# Altium PCB PCB1.PcbDoc
Units mil, origin at the board's own origin, x right, y up, seen from the top; angles counter-clockwise.
Board outline 5721.11 x 4025 mil, 2 copper layers (Top Layer, Bottom Layer), stack 61.756 mil thick; 41 components, 18 nets, 112 pads, 2 vias.
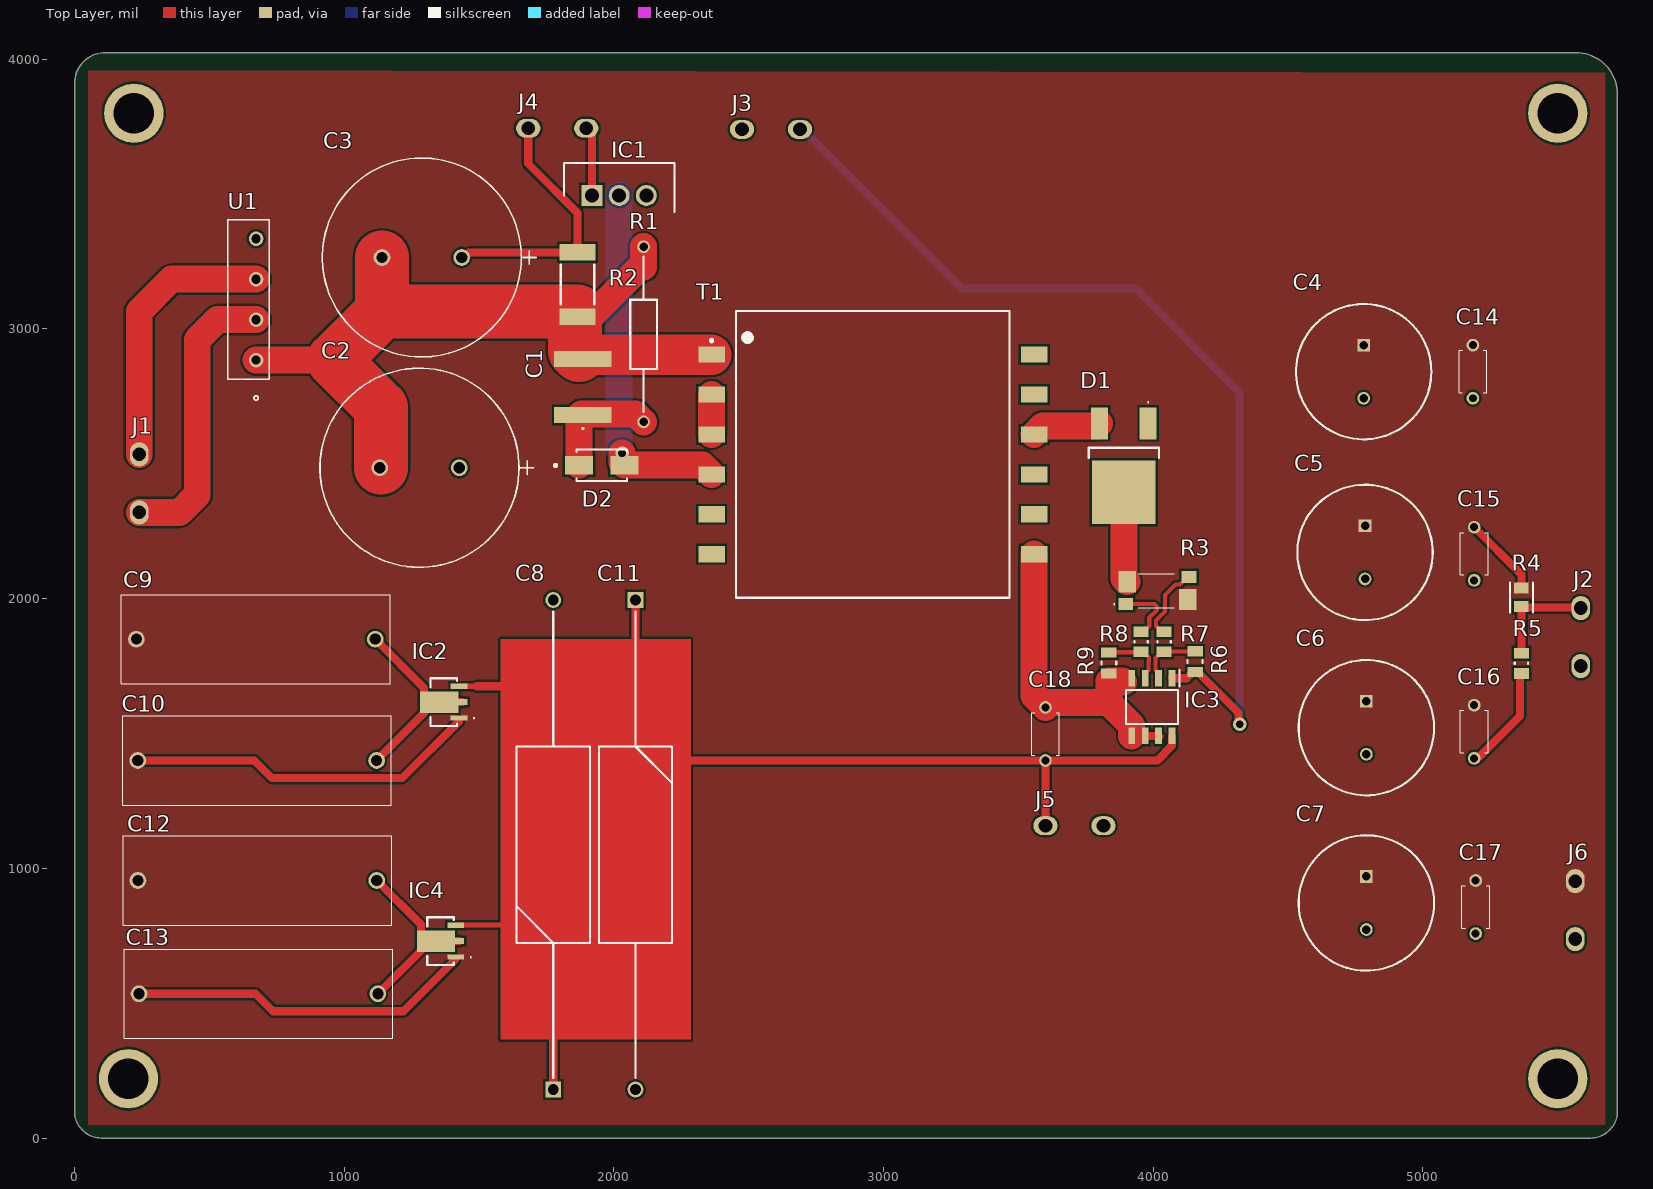
[diagram p0: Top Layer view]
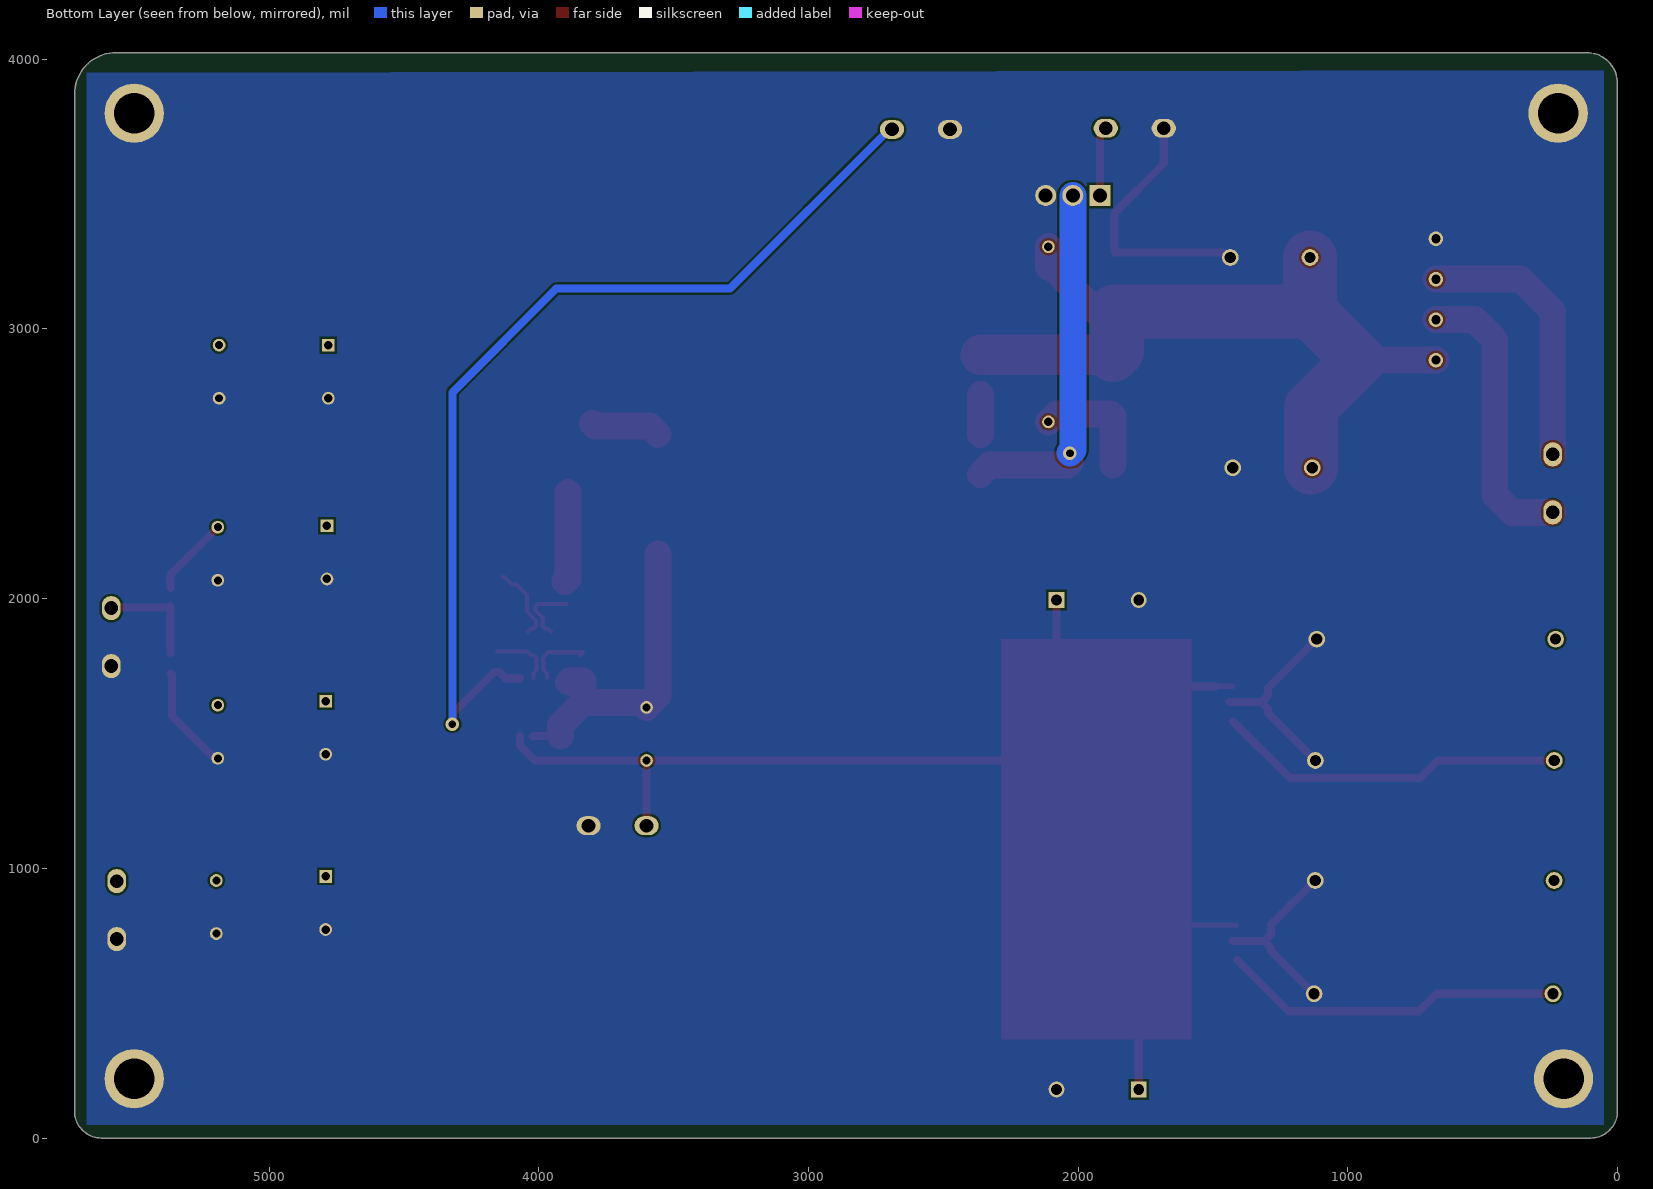
[diagram p1: Bottom Layer view, seen from below]
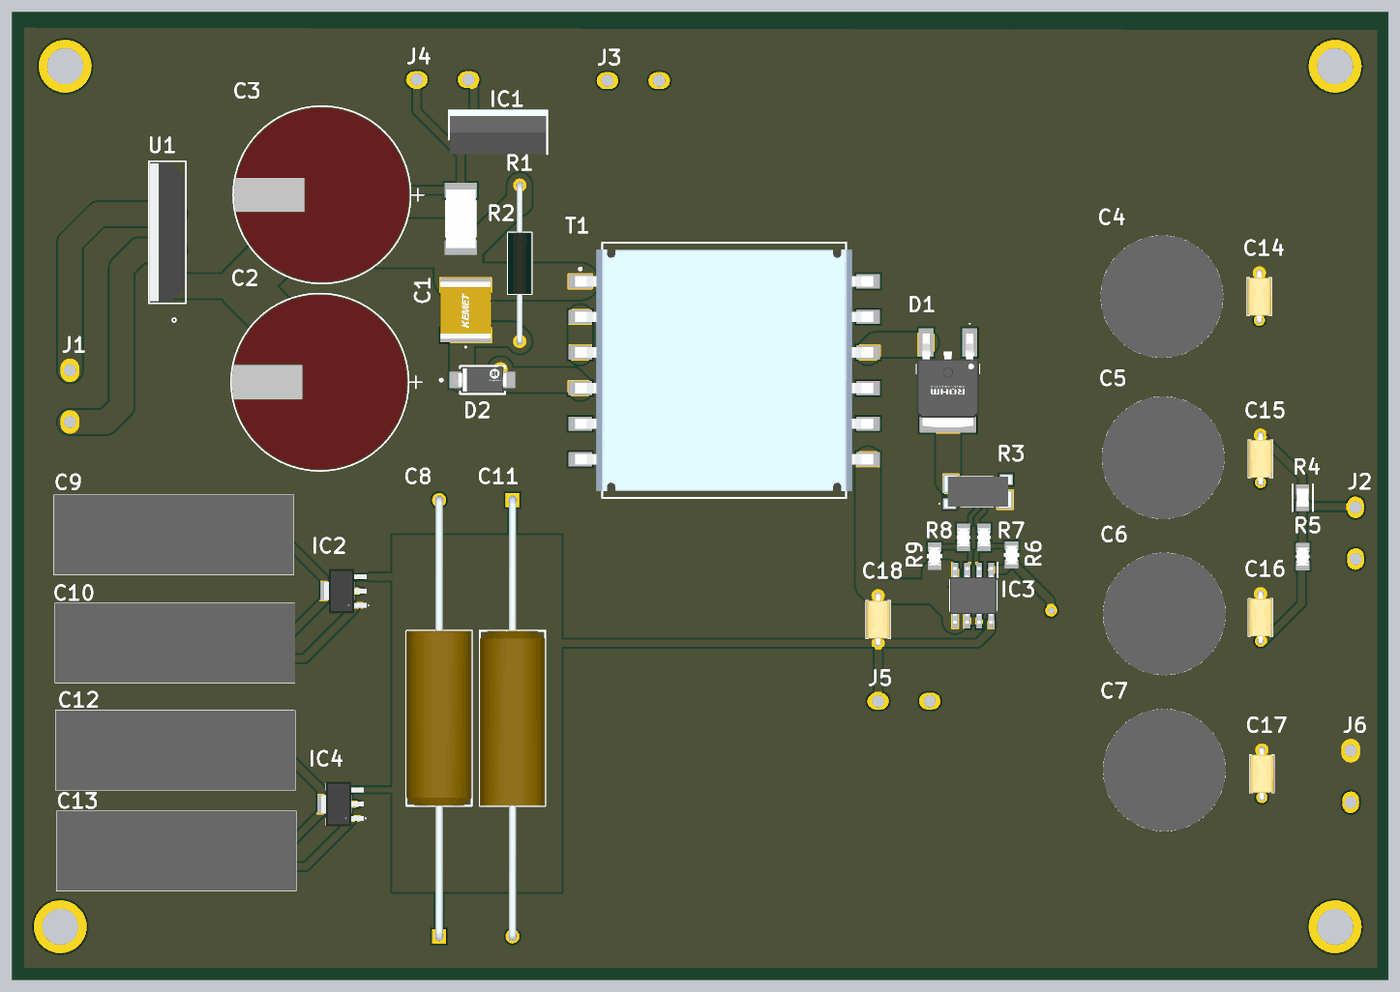
[diagram p2: 3D render of the assembled board from above, using the file's embedded part models]

## Layer stack, top to bottom
Top Solder: solder mask 1, SM-001, Dk 4
Top Layer: signal copper 1.378
Dielectric 1: core 59, Core-043, Dk 4.3
Bottom Layer: signal copper 1.378
Bottom Solder: solder mask 1, SM-001, Dk 4

## Board outline
5215,4025 5566.11,4025 cw(c5566.11,3870.01) 5721.11,3870 5721.11,100 cw(c5621.12,99.99) 5621.11,0 100,0 cw(c100,100) 0,100 0,3910 cw(c115,3910) 115,4025

## Design rules (kind name [scope] priority, off if disabled: settings)
BoardOutlineClearance [All] p1: gap=7.87 ignorepadtopadclearanceinfootprint=FALSE except(15.75: Arc-SplitBarrior Arc-SplitContinuation Track-SplitBarrior Track-SplitContinuation SMDPad-SplitBarrior SMDPad-SplitContinuation THPad-SplitBarrior THPad-SplitContinuation Via-SplitBarrior Via-SplitContinuation Fill-SplitBarrior Fill-SplitContinuation Poly-SplitBarrior Poly-SplitContinuation Region-SplitBarrior Region-SplitContinuation Text-SplitBarrior Text-SplitContinuation)
Clearance "Clearance Bottom Layer" [OnLayer('Bottom Layer')] p1: gap=8 ignorepadtopadclearanceinfootprint=TRUE except(10: Arc-Text Track-Text SMDPad-Text THPad-Text Via-Text Fill-Text Poly-Text Region-Text Text-Text)
Clearance "Clearance Top Layer" [OnLayer('Top Layer')] p2: gap=8 ignorepadtopadclearanceinfootprint=TRUE except(10: Arc-Text Track-Text SMDPad-Text THPad-Text Via-Text Fill-Text Poly-Text Region-Text Text-Text)
Clearance [All] p3: gap=7.87 ignorepadtopadclearanceinfootprint=FALSE except(3.5: Arc-Arc Arc-Track Arc-SMDPad Track-Track Track-SMDPad SMDPad-SMDPad; 5: Arc-Via Track-Via SMDPad-Via THPad-Via Via-Via; 10: Arc-Text Track-Text SMDPad-Text THPad-Text Via-Text Fill-Text Poly-Text Region-Text Text-Text)
DiffPairsRouting [All] p1: maxlimit=10 minlimit=10 mostfreqgap=10 toplayer_minwidth=15 toplayer_maxwidth=15 toplayer_prefwidth=15 bottomlayer_minwidth=15 bottomlayer_maxwidth=15 bottomlayer_prefwidth=15 maxuncoupledlength=500
HoleSize [All] p1: absolutevalues=TRUE maxlimit=248.03 minlimit=7.87 maxpercent=80.000 minpercent=20.000
MinimumAnnularRing [All] p1: minimumring=3
MinimumSolderMaskSliver [All] p1: minsoldermaskwidth=3.94
PolygonConnect PolygonConnect_1 [All] p1: connectstyle=Direct reliefconductorwidth=20 reliefentries=4 polygonreliefangle="90 Angle" airgapwidth=10
RoutingCorners [All] p1: cornerstyle=Round minsetback=100 maxsetback=100
RoutingVias [All] p1: holewidth=19.68 width=39.37 viastyle="Through Hole" minholewidth=7.87 minwidth=17.72 maxholewidth=39.37 maxwidth=78.74
SilkToSilkClearance [All] p1: silktosilkclearance=3.94
SilkToSolderMaskClearance [IsPad] p1: minsilkscreentomaskgap=3.94 clearancetoexposedcopper=TRUE
SolderMaskExpansion [All] p1: expansion=4 istentingtop=FALSE
Width [All] p1: maxlimit=300 minlimit=3.5 preferedwidth=15 minimp=50.000000 maximp=50.000000 favimp=50.000000
24 further rules are at their usual default settings.

## Classes and differential pairs
differential pair SENSE: +SENSE_P -SENSE_N
differential pair SENSE_OP: +SENSE_OP_P -SENSE_OP_N

## Components (designator, comment, footprint, x,y, rotation, side; value= is the part's Value field where it differs from the comment)
C1 "C2220C105K2RACTU" C2220 1885,2785 r90 top
C2 "500HXW100MEFR18X45" CAP_HXW_18X45_RUB#1 1426.7,2485.45 r180 top
C3 "500HXW100MEFR18X45" CAP_HXW_18X45_RUB#2 1435.28,3265 r180 top
C4 "EGXF630ELL511MK25S" CAPPRD500W60D1275H2650 4780,2940 r270 top
C5 "EGXF630ELL511MK25S" CAPPRD500W60D1275H2650 4785,2270 r270 top
C6 "EGXF630ELL511MK25S" CAPPRD500W60D1275H2650 4790,1620 r270 top
C7 "EGXF630ELL511MK25S" CAPPRD500W60D1275H2650 4790,970 r270 top
C8 "MAL202139229E3" CAPPA4610W80L1850D690 1775,180 r90 top
C9 "ECW-FD2J105J" ECWFD2J105J 1115,1850 r180 top
C10 "ECW-FD2J105J" ECWFD2J105J 1120,1400 r180 top
C11 "MAL202139229E3" CAPPA4610W80L1850D690 2080,1995 r270 top
C12 "ECW-FD2J105J" ECWFD2J105J 1120.83,955 r180 top
C13 "ECW-FD2J105J" ECWFD2J105J 1125,535 r180 top
C14 "K104K15X7RF5TH5" K104K15X7RF5TH5 5185,2743.15 r90 top
C15 "K104K15X7RF5TH5" K104K15X7RF5TH5 5190,2068.15 r90 top
C16 "K104K15X7RF5TH5" K104K15X7RF5TH5 5190,1408.15 r90 top
C17 "K104K15X7RF5TH5" K104K15X7RF5TH5 5195.55,758.06 r90 top
C18 "K104K15X7RF5TH5" K104K15X7RF5TH5 3600,1596.85 r270 top
D1 "RFN5BGE3STL" RD3P175SNFRATL 3890.55,2482.68 r180 top
D2 "S1M" FP-403AE-MFG 1955,2495 r0 top
IC1 "STP8N80K5" TO255P460X1020X2008-3P 1919.21,3495 r0 top
IC2 "NCP785AH50T1G" NCP785AH50T1G 1369.06,1616.2 r90 top
IC3 "TL032ID" SOIC127P600X175-8N 3995,1598.23 r270 top
IC4 "NCP785AH50T1G" NCP785AH50T1G 1356.93,730 r90 top
J1 "Component_1" PCBComponent_1 240,2320 r90 top
J2 "Component_1" PCBComponent_1 5585,1965 r270 top
J3 "Component_1" PCBComponent_1 2690,3740 r180 top
J4 "Component_1" PCBComponent_1 1897.39,3744.14 r180 top
J5 "Component_1" PCBComponent_1 3600,1158.41 r0 top
J6 "Component_1" PCBComponent_1 5564.75,952.68 r270 top
R1 "MRS25000C7500FRP00" RESAD1650W60L650D250 2110,3305 r270 top
R2 "CRCW251210K0JNEG" FP-CRCW2512-e3-IPC_A 1865,3165 r270 top
R3 "Y14870R10000B9R" Y14870R10000B9R 4015,2030 r0 top
R4 "CR0805-FX-1003ELF" FP-CR0805-IPC_B 5365,2005 r90 top
R5 "CRCW080520K0FKTA" FP-CRCW0805-e3-IPC_B 5365,1760 r90 top
R6 "CRCW0805330KFKEA" FP-CRCW0805-e3-MFG 4155,1766.61 r270 top
R7 "CRCW080520K0FKEB" FP-CRCW0805-e3-IPC_B 4040,1840 r270 top
R8 "CRCW080520K0FKEB" FP-CRCW0805-e3-IPC_B 3955,1840 r270 top
R9 "CRCW0805330KFKEA" FP-CRCW0805-e3-MFG 3835,1761.61 r90 top
T1 "750311771" EFD25 2960,2535 r0 top
U1 "KBP210G" TO_P2005G_DIO 673.23,2884.45 r90 top

## Footprints (in the part's own frame and the unit in brackets; to place one, negate y for a bottom-side part, rotate by r counter-clockwise, add the part's x,y. Pads: shape width x height; smd on the part's side, far side on the other; paste and mask are expansions set on the pad)
C2220 [mm]
  rect 1.5x5.4 smd: 1(-2.65,0) 2(2.65,0)
  silkscreen extent -3.95,-0.05 -3.85,0.05, body extent -3.05,-2.7 3.05,2.7, height 1.15
CAP_HXW_18X45_RUB#1 [mil]
  round 62 / inner round 60 / far side round 62 hole 42 paste-31 mask+0: 1(0,0) 2(295.28,0)
  silkscreen extent -276,-369 516,369, body extent -216,-363 512,363, height 1851
CAP_HXW_18X45_RUB#2 [mil]
  round 62 hole 42 paste-31 mask+0: 1(0,0)
  round 62 / inner round 60 / far side round 62 hole 42 paste-31 mask+0: 2(295.28,0)
  silkscreen extent -276,-369 516,369, body extent -216,-363 512,363, height 1851
CAPPA4610W80L1850D690 [mm]
  rect 1.5x1.5 hole 1: 1(0,0)
  round 1.5 hole 1: 2(46.1,0)
  silkscreen extent 1.1,-3.45 45,3.45, body extent -0.4,-3.45 46.5,3.45, height 6.89
CAPPRD500W60D1275H2650 [mm]
  rect 1.2x1.2 hole 0.8: 1(0,0)
  round 1.2 hole 0.8: 2(5,0)
  silkscreen extent -3.87,-6.37 8.87,6.38, body extent -4,-6.49 9,6.49, height 26.5
ECWFD2J105J [mm]
  round 1.575 hole 1.05: 1(0,0) 2(22.5,0)
  silkscreen extent -1.4,-4.2 23.9,4.2, body extent -1.4,-4.2 23.9,4.2, height 15.1
EFD25 [mm] "SMD, 12-Leads, Body 27.0x28.0mm (max), Pitch 3.76mm, IPC Medium Density"
  rect 2.5x1.52 smd: 1(-15.19,9.4) 2(-15.19,5.64) 3(-15.19,1.88) 4(-15.19,-1.88) 5(-15.19,-5.64) 6(-15.19,-9.4) 7(15.19,-9.4) 8(15.19,-5.64) 9(15.19,-1.88) 10(15.19,1.88) 11(15.19,5.64) 12(15.19,9.4)
  silkscreen extent -15.31,-13.5 12.87,13.5, body extent -15.75,-12.75 15.75,12.75, height 13.25
FP-403AE-MFG [mm]
  rect 2.65x1.75 smd paste+0 mask+0: 1(-2.15,0) 2(2.15,0)
  silkscreen extent -4.47,-1.48 2.37,1.48, body extent -3.57,-1.58 3.57,1.58, height 0.25
FP-CR0805-IPC_B [mil]
  rect 41.66x53.63 smd paste+0 mask+0: 1(-34.53,0) 2(34.53,0)
  silkscreen extent -55,-43 55,43, body extent -65,-37 65,37, height 10
FP-CRCW0805-e3-IPC_B [mil]
  rect 39.63x55.44 smd paste+0 mask+0: 1(-37.44,0) 2(37.44,0)
  silkscreen extent -3,-25 3,25, body extent -67,-38 67,38, height 10
FP-CRCW0805-e3-MFG [mm]
  rect 0.95x1.45 smd paste+0 mask+0: 1(-0.975,0) 2(0.975,0)
  silkscreen extent -0.13,-0.7 0.13,0.7, body extent -1.55,-0.82 1.55,0.82, height 0.25
FP-CRCW2512-e3-IPC_A [mil]
  rect 61.22x134.18 smd paste+0 mask+0: 1(-119.12,0) 2(119.12,0)
  silkscreen extent -74,-62 74,62, body extent -169,-87 169,87, height 10
K104K15X7RF5TH5 [mm]
  round 1.2 hole 0.75: 1(0,0) 2(5,0)
  silkscreen extent 0.5,-1.3 4.5,1.3, body extent -0.25,-1.3 5.25,1.3, height 7.31
NCP785AH50T1G [mm]
  rect 0.5x1.57 smd: 1(-1.5,-1.44) 3(1.5,-1.44)
  rect 0.58x0.86 smd: 2(0,-1.795)
  rect 2x3.59 smd: 4(0,0.43)
  silkscreen extent -2.25,-2.9 2.25,1.25, body extent -2.35,-2.64 2.35,1.85, height 1.76
PCBComponent_1 [mil]
  oval 90x70 hole 50.8: 0(0,0) 1(215,0)
RD3P175SNFRATL [mm]
  rect 1.6x3 smd: 1(-2.3,-4.25) 3(2.3,-4.25)
  rect 6x6 smd: 2(0,2.25)
  silkscreen extent -3.3,-6.3 3.3,-1, body extent -3.3,-5.2 3.3,4.7, height 2.5
RESAD1650W60L650D250 [mm]
  round 1.2 hole 0.8: 1(0,0) 2(16.5,0)
  silkscreen extent 0.95,-1.25 15.55,1.25, body extent -0.3,-1.24 16.8,1.24, height 2.5
SOIC127P600X175-8N [mm]
  rect 1.525x0.65 smd: 1(-2.712,1.905) 2(-2.712,0.635) 3(-2.712,-0.635) 4(-2.712,-1.905) 5(2.712,-1.905) 6(2.712,-0.635) 7(2.712,0.635) 8(2.712,1.905)
  silkscreen extent -3.47,-2.45 1.6,2.58, body extent -3,-2.45 3,2.45, height 1.75
TO255P460X1020X2008-3P [mm]
  rect 1.98x1.98 hole 1.32: 1(0,0)
  round 1.98 hole 1.32: 2(2.55,0) 3(5.1,0)
  silkscreen extent -2.65,-1.53 7.75,3.07, body extent -2.55,-1.53 7.65,3.07, height 19.22
TO_P2005G_DIO [mil]
  round 54 / inner round 60 / far side round 54 hole 34 paste-27 mask+0: 1(0,0) 2(150,0) 3(300,0) 4(450,0)
  silkscreen extent -148,-49 520,105, body extent -66,-44 516,100, height 808
Y14870R10000B9R [mm]
  rect 1.39x1.14 smd: E1(-2.985,-1.27) E2(2.985,1.27)
  rect 1.65x2.01 smd: I1(-2.855,0.835) I2(2.855,-0.835)
  silkscreen extent -4.1,-1.6 1.6,1.6, body extent -3.57,-1.73 3.57,1.73, height 0.73

## Part data
C1: "Capacitor", Manufacturer_Name=KEMET, Supplier Part Number 1=80-C2220C105K2RACTU, Datasheet Link=https://content.kemet.com/datasheets/KEM_C1002_X7R_SMD.pdf, Height=2.2mm, Manufacturer_Part_Number=C2220C105K2RACTU, Supplier 1=Mouser
C2 C3: "No Description Available", Mfr_Name=Rubycon, Supplier Part Number 1=232-0HXW100MEFR18X45, Digi-Key_Part_Number_1=1189-4253-ND, Supplier 1=Mouser
C4 C5 C6 C7: "Capacitor Polarised", Manufacturer_Name=Chemi-Con, Mouser Part Number=661-EGXF630ELL511MK2, Datasheet Link=https://www.mouser.com/datasheet/2/420/United-Chemi-Con-1016798.pdf, Height=26.5mm, Manufacturer_Part_Number=EGXF630ELL511MK25S, Mouser Price/Stock=https://www.mouser.co.uk/ProductDetail/United-Chemi-Con/EGXF630ELL511MK25S?qs=8BXZADTIn4FuMrtucNpwhg%3D%3D
  C4: Supplier 1=Mouser, Supplier Part Number 1=661-EGXF630ELL511MK2
C8 C11: "Capacitor Polarised", Manufacturer_Name=Vishay, Mouser Part Number=594-2222-021-39229, Arrow Part Number=MAL202139229E3, Arrow Price/Stock=https://www.arrow.com/en/products/mal202139229e3/vishay?region=nac, Datasheet Link=https://componentsearchengine.com/Datasheets/2/MAL202139229E3.pdf, Manufacturer_Part_Number=MAL202139229E3, Mouser Price/Stock=https://www.mouser.co.uk/ProductDetail/Vishay-BC-Components/MAL202139229E3?qs=KQJA%252BRRrFWe8KeR1ZcOE%2FA%3D%3D
  C8: Supplier 1=Mouser, Supplier Part Number 1=594-2222-021-39229
C9 C10 C12 C13: "Capacitor", Manufacturer_Name=Panasonic, Mouser Part Number=667-ECW-FD2J105J, Arrow Part Number=ECW-FD2J105J, Arrow Price/Stock=https://www.arrow.com/en/products/ecw-fd2j105j/panasonic, Datasheet Link=https://industrial.panasonic.com/cdbs/www-data/pdf/RDI0000/ABD0000C255.pdf, Height=15mm, Manufacturer_Part_Number=ECW-FD2J105J, Mouser Price/Stock=https://www.mouser.com/Search/Refine.aspx?Keyword=667-ECW-FD2J105J
  C9: Supplier 1=Mouser, Supplier Part Number 1=667-ECW-FD2J105J
C14 C15 C16 C17 C18: "Capacitor", Manufacturer_Name=Vishay, Mouser Part Number=594-K104K15X7RF5TH5, Arrow Part Number=K104K15X7RF5TH5, Arrow Price/Stock=https://www.arrow.com/en/products/k104k15x7rf5th5/vishay?region=europe, Datasheet Link=https://www.vishay.com/docs/45171/kseries.pdf, Height=6.6mm, Manufacturer_Part_Number=K104K15X7RF5TH5, Mouser Price/Stock=https://www.mouser.co.uk/ProductDetail/Vishay-BC-Components/K104K15X7RF5TH5?qs=CuWZN%2F5Vbiofhf%252BuZNGw%2Fg%3D%3D
  C14: Supplier 1=Mouser, Supplier Part Number 1=594-K104K15X7RF5TH5
D1: "Diode", Manufacturer_Name="ROHM Semiconductor", Mouser Part Number=755-RFN5BGE3STL, Datasheet Link=https://fscdn.rohm.com/en/products/databook/datasheet/discrete/diode/fast_recovery/rfn5bge3s-e.pdf, Manufacturer_Part_Number=RFN5BGE3STL, Mouser Price/Stock=https://www.mouser.co.uk/ProductDetail/ROHM-Semiconductor/RFN5BGE3STL?qs=gTYE2QTfZfS830v3%252BAHYoA%3D%3D, Supplier 1=Mouser, Supplier Part Number 1=755-RFN5BGE3STL
D2: library part CMP-2000-04942-3, "DIODE GEN PURP 1KV 1A SMA", Average Rectified Current=1A, Capacitance=12pF, Case/Package=SMA, Forward Voltage=1.1V, Max Forward Surge Current (Ifsm)=30A, Max Operating Temperature=150°C, Max Repetitive Reverse Voltage (Vrrm)=1kV, Max Surge Current=40A, Min Operating Temperature=-55°C, Package Quantity=1, Peak Reverse Current=1uA, Power Dissipation=1.4W, Contact Plating=Tin, Current=1A, Current Rating=1A, Element Configuration=Single, Forward Current=1A, Height=2.2mm, Lead Free="Lead Free", Length=4.75mm, Max Reverse Voltage (DC)=1kV, Mount="Surface Mount", Number of Pins=2, Output Current=1A, Packaging="Tape and Reel", Peak Non-Repetitive Surge Current=30A, Polarity=Standard, Radiation Hardening=No, REACH SVHC="No SVHC", Recovery Time=1800ns, Reverse Recovery Time=1.8us, Reverse Voltage=1kV, Termination=SMD/SMT, Voltage=1kV, Voltage Rating (DC)=1kV, Width=5.28mm
IC1: "Integrated Circuit", Manufacturer_Name=STMicroelectronics, Mouser Part Number=511-STP8N80K5, Supplier Part Number 1=511-STU8N80K5, Datasheet Link=https://www.st.com/resource/en/datasheet/stp8n80k5.pdf, Height=4.6mm, Manufacturer_Part_Number=STP8N80K5, Mouser Price/Stock=https://www.mouser.co.uk/ProductDetail/STMicroelectronics/STP8N80K5?qs=RzIIFhRKomv5IC85NofN1A%3D%3D, Supplier 1=Mouser
IC2 IC4: "Integrated Circuit", Manufacturer_Name=onsemi, Mouser Part Number=863-NCP785AH50T1G, Arrow Part Number=NCP785AH50T1G, Arrow Price/Stock=https://www.arrow.com/en/products/ncp785ah50t1g/on-semiconductor?region=nac, Datasheet Link=http://www.mouser.com/ds/2/308/NCP785A-D-532012.pdf, Height=1.6mm, Manufacturer_Part_Number=NCP785AH50T1G, Mouser Price/Stock=https://www.mouser.co.uk/ProductDetail/onsemi/NCP785AH50T1G?qs=k6dkFvHqcvALNdsDcRACbw%3D%3D, Supplier 1=Mouser, Supplier Part Number 1=863-NCP785AH50T1G
IC3: "Integrated Circuit", Manufacturer_Name="Texas Instruments", Mouser Part Number=595-TL032ID, Arrow Part Number=TL032ID, Arrow Price/Stock=https://www.arrow.com/en/products/tl032id/texas-instruments, Datasheet Link=http://www.ti.com/lit/ds/symlink/tl032.pdf, Height=1.75mm, Manufacturer_Part_Number=TL032ID, Mouser Price/Stock=https://www.mouser.co.uk/ProductDetail/Texas-Instruments/TL032ID?qs=RZS%252BpEsUn7pGfb6fvXIvLw%3D%3D, Supplier 1=Mouser, Supplier Part Number 1=595-TL032ID
R1: "Resistor", Manufacturer_Name=Vishay, Supplier Part Number 1=594-MRS25000C7500FRP, Datasheet Link=http://www.vishay.com/docs/28724/mrs16m25.pdf, Manufacturer_Part_Number=MRS25000C7500FRP00, Supplier 1=Mouser
R2: library part CMP-02407-002758-1, "RES Thick Film, 10kΩ, 5%, 1W, 200ppm/°C, 2512", Case Code (Imperial)=2512, Case Code (Metric)=6432, Max Operating Temperature=155°C, Max Power Dissipation=1W, Min Operating Temperature=-55°C, Package Quantity=1, Resistance=10kR, Temperature Coefficient=200ppm/°C, Tolerance=5%, Voltage Rating=500V, Case/Package=2512, Composition="Thick Film", Contact Plating=Tin, Depth=3.15mm, Features="Automotive AEC-Q200", Height=0.028inch, Lead Free="Lead Free", Length=6.3mm, Military Standard=Not, Mount="Surface Mount", Number of Pins=2, Number of Terminations=2, Packaging="Tape and Reel", Power Rating=1W, Radiation Hardening=No, REACH SVHC="No SVHC", Termination=SMD/SMT, Voltage Rating (DC)=500V, Weight=0.001429oz, Width=0.124inch
R3: "Resistor", Manufacturer_Name=Vishay, Mouser Part Number=71-CSM25120R1000BST, Arrow Part Number=Y14870R10000B9R, Arrow Price/Stock=https://www.arrow.com/en/products/y14870r10000b9r/vishay-precision-group?region=nac, Datasheet Link=http://uk.rs-online.com/web/p/products/6841649, Height=0.635mm, Manufacturer_Part_Number=Y14870R10000B9R, Mouser Price/Stock=https://www.mouser.co.uk/ProductDetail/Vishay-Precision-Group-Foil-Resistors/Y14870R10000B9R?qs=eqe8eff%252BweTiXYXyeP50BA%3D%3D, Supplier 1=Mouser, Supplier Part Number 1=71-CSM25120R1000BST
R4: library part CMP-1013-00736-2, "Thick Film Chip Resistors 0805 100kΩ 0.125W 1% 100ppm/°C", Case Code (Imperial)=0805, Case Code (Metric)=2012, Max Operating Temperature=155°C, Max Power Dissipation=125mW, Min Operating Temperature=-55°C, Package Quantity=5000, Resistance=100kR, Temperature Coefficient=100ppm/°C, Tolerance=1%, Voltage Rating=150V, Voltage Rating (DC)=100V, Case/Package=0805, Composition="Thick Film", Contact Plating=Tin, Depth=1.25mm, Features="Moisture Resistant", Height=0.5mm, Length=2mm, Mount="Surface Mount", Number of Pins=2, Number of Terminations=2, Packaging="Tape and Reel", Power Rating=125mW, Radiation Hardening=No, REACH SVHC="No SVHC", Termination=SMD/SMT, Thickness=508um, Width=1.25mm
R5 R7 R8: library part CMP-2001-04226-2, "RES Thick Film, 20kΩ, 1%, 0.125W, 100ppm/°C, 0805", Case Code (Imperial)=0805, Case Code (Metric)=2012, Max Operating Temperature=155°C, Max Power Dissipation=125mW, Min Operating Temperature=-55°C, Package Quantity=10000, Resistance=20kR, Temperature Coefficient=100ppm/°C, Tolerance=1%, Voltage Rating=150V, Case/Package=0805, Composition="Thick Film", Features="Automotive AEC-Q200", Height=0.02inch, Lead Free="Lead Free", Length=0.079inch, Number of Pins=2, Number of Terminations=2, Packaging="Tape and Reel", Power Rating=125mW, Voltage Rating (DC)=150V, Weight=0.000194oz, Width=0.049inch
R6 R9: library part CMP-2001-03821-2, "RES Thick Film, 330kΩ, 1%, 0.125W, 100ppm/°C, 0805", Case Code (Imperial)=0805, Case Code (Metric)=2012, Max Operating Temperature=155°C, Min Operating Temperature=-55°C, Package Quantity=5000, Power Rating=125mW, Resistance=330kR, Temperature Coefficient=100ppm/°C, Tolerance=1%, Voltage Rating=150V, Case/Package=0805, Composition="Thick Film", Contact Plating=Tin, Depth=1.25mm, Height=0.45mm, Lead Free="Lead Free", Length=2mm, Military Standard=Not, Packaging="Tape and Reel", Radiation Hardening=No, Termination=SMD/SMT, Voltage Rating (DC)=150V, Weight=0.000194oz, Width=1.25mm
T1: library part CMP-1360-00010-1, "Flyback Transformer suitable or LT3573/ LT3574/ LT3575/ LT3748 WE-FB, Ui=100-400V", Manufacturer="Wuerth Elektronik", ComponentLink1Description="Manufacturer URL", ComponentLink1URL=http://www.we-online.com, ComponentLink2Description=Datasheet, ComponentLink2URL=http://katalog.we-online.de/pbs/datasheet/750311771.pdf, PackageReference=EFD25, PartNumber=750311771, Ui=100-400V
U1: "No Description Available", Mfr_Name="Diodes Inc", Supplier Part Number 1=621-KBP210G, Digi-Key_Part_Number_1=KBP210GDI-ND, Digi-Key_Part_Number_2=2721-KBP210G-ND, Digi-Key_Part_Number_3=2796-KBP210G-ND, Digi-Key_Part_Number_4=KBP210GGS-ND, RefDes=RefDes, Supplier 1=Mouser, Type=Type

## Free pads (board coordinates)
  round 220 hole 150: 2(200,220) 2(220,3800) 2(5500,220) 2(5500,3800)

## Via types
v1: diameter 50, hole 28, Top Layer to Bottom Layer, 2 vias

## Nets (pads, with @x,y where several pads share a name; then routed paths per layer and width w, separated by ;. In a path a pad name is that pad's centre, name@x,y a point inside that pad or via, vN(x,y) a via of type N, cw(c..) or ccw(c..) an arc to the next point about the centre after c; other vN are vias at no path point)
+5: C8.1 C11.1 C18.2 IC2.3 IC3.8 IC4.3 J5.0 | length 3616
  Top Layer w20: IC4.3 1414.57,790 1590,790 1775,605 1775,575 ; IC2.3 1489.74,1675.26
  Top Layer w30: 1489.74,1675.26 1774.74,1675.26 1785,1665 ; C8.1 1775,555 1780,560 ; 2070,1765 2080,1775 C11.1 ; 2205,1405 2210,1400 C18.2 ; J5.0 C18.2 ; IC3.8 4070,1455 4015,1400 C18.2
GND: C2.1 C3.1 C4.2 C5.2 C6.2 C7.2 C8.2 C9.1 C10.1 C11.2 C12.1 C13.1 C14.1 C15.1 C16.1 C17.1 C18.1 IC1.3 IC2.2 IC2.4 IC3.4 IC3.5 IC3.6 IC3.7 IC4.2 IC4.4 J2.1 J3.1 J4.1 J5.1 J6.1 pad.2 R2.1 R5.1 R9.1 T1.7 U1.4 | length 4023.3
  Top Layer w30: C9.1 1296.46,1668.54 1296.46,1640.57 IC2.4@1320.83,1616.2 ; C10.1 1296.46,1576.46 1296.46,1591.83 IC2.4@1320.83,1616.2 ; C12.1 1284.33,791.5 1284.33,754.37 IC4.4@1308.7,730 ; C13.1 1284.33,694.33 1284.33,705.63 IC4.4@1308.7,730 ; IC4.2 IC4.4 IC4.4@1308.7,730 ; C3.1 1443.93,3265 1463.05,3284.12 R2.1 1865,3430.22 1682.39,3612.82 J4.1 ; IC2.2@1438.08,1616.2 IC2.4 IC2.4@1320.83,1616.2 ; IC3.5 IC3.6 IC3.7 IC3.7@4022.2,1489.25 ; C16.1 5193.3,1411.45 5206.45,1411.45 5360.19,1565.19 5360.19,1717.75 R5.1
  Top Layer w100: T1.7 3558.03,1638.82 C18.1 3618.15,1615 3835,1615 ; 3890,1690 3885,1695 3835,1695 3835,1615 ; IC3.5 3920,1530 3835,1615
GND1: J1.1 U1.3 | length 1013.2
  Top Layer w100: J1.1 240,3065 360,3185 672.68,3185 U1.3
NetC1_1: C1.1 D2.1 R1.2 | length 437
  Top Layer w100: D2.1 1870.18,2495.18 1870.18,2675.65 1870,2675.83 1879.17,2685 2080.39,2685 R1.2
NetD1_2: D1.2 R3.I1 | length 336.2
  Top Layer w100: D1.2 3890.55,2074.92 R3.I1
NetD1_3: D1.3 T1.10 | length 258.9
  Top Layer w100: T1.10 3589.96,2640.94 3790.94,2640.94 D1.3
NetD2_2: D2.2 IC1.2 T1.4 | length 1344.7
  Top Layer w100: v1(2030,2540) 2030,2504.65 D2.2 2327.95,2495 T1.4
  Bottom Layer w100: IC1.2 2019.61,2550.39 v1(2030,2540)
NetIC1_1: IC1.1 J4.0 | length 258.2
  Top Layer w30: J4.0 1897.39,3743.32 1919.21,3721.5 IC1.1
NetIC3_1: IC3.1 J3.0 R6.2 | length 3627
  Top Layer w30: IC3.1 4123.88,1705 4141.46,1722.57 4141.46,1724.53 4145.16,1728.23 R6.2 4164.84,1728.23 4316.17,1576.9 4316.17,1538.83 v1(4320,1535)
  Bottom Layer w30: J3.0 2700,3740 3290,3150 3935,3150 4320,2765 v1(4320,1535)
NetJ1_0: J1.0 U1.2 | length 1066
  Top Layer w100: J1.0 390,2320 455,2385 455,2960 529.45,3034.45 U1.2
NetJ2_0: J2.0 R4.1 R5.2 | length 395.3
  Top Layer w30: R5.2 R4.1 5367.74,1967.74 5582.26,1967.74 J2.0
NetT1_2: T1.2 T1.3 | length 148
  Top Layer w100: T1.3 T1.2
SENSE_N: R3.E2 R7.1 | length 284.1
  Top Layer w15: R7.1 4027.69,1889.75 4018.79,1889.75 4010,1898.54 4010,1919.75 4043.23,1952.98 4043.23,2013.23 4082.19,2052.19 4099.79,2052.19 4127.6,2080 R3.E2
SENSE_OP_N: IC3.2 R6.1 R7.2 | length 237.4
  Top Layer w15: IC3.2 4020,1722.22 4007.5,1734.72 4007.5,1757.52 4008.66,1758.68 4008.66,1780.13 4018.79,1790.25 4027.69,1790.25 R7.2 4041.22,1803.78 4153.78,1803.78 R6.1
SENSE_OP_P: IC3.3 R8.2 R9.2 | length 254.9
  Top Layer w15: R9.2@3845,1790 R9.2 3836.28,1801.28 3953.72,1801.28 R8.2 3962.91,1802.56 3983.66,1781.81 3983.66,1769.04 3982.5,1767.88 3982.5,1734.72 3970,1722.22 IC3.3
SENSE_P: R3.E1 R8.1 | length 243.1
  Top Layer w15: R3.E1 4004.9,1980 4013.68,1971.21 4013.68,1958.79 3985,1930.1 3985,1898.54 3976.21,1889.75 3967.31,1889.75 R8.1
VCC: C4.1 C5.1 C6.1 C7.1 C9.2 C10.2 C12.2 C13.2 C14.2 C15.2 C16.2 C17.2 IC2.1 IC4.1 J6.0 R3.I2 R4.2 | length 2879.1
  Top Layer w30: C10.2 666.48,1400 731.48,1335 1215,1335 1425,1545 ; C13.2 671.48,535 736.48,470 1220,470 1410,660 ; C15.2 5365,2090 R4.2
VCC_HI: C1.2 C2.2 C3.2 R1.1 R2.2 T1.1 U1.1 | length 2969.2
  Top Layer w100: U1.1 960.26,2884.45 ; R2.2 1913.75,3045.88 2097.87,3230 2110,3230 R1.1 ; C1.2@1867.5,2906.67 C1.2@1870,2904.17 ; T1.1@2361.06,2904.17 T1.1
  Top Layer w150: C1.2@1870,2904.17 T1.1@2361.06,2904.17
  Top Layer w200: C2.2@1136.1,2485.38 1136.1,2708.61 960.26,2884.45 1140,3064.19 ; C3.2 1140,3064.19 ; R2.2@1855.37,3036.25 1855.37,2918.8 C1.2@1870,2904.17 ; R2.2@1865,3064.19 1140,3064.19
pads on no net: D1.1 T1.5 T1.6 T1.8 T1.9 T1.11 T1.12

## Polygon pours and split planes (outlines as drawn)
GND on Bottom Layer "GND_L02_P002" (solid, pour order 2): 50,3960 50,50 5675,50 5675,3950
VCC on Top Layer "VCC_L01_P000" (solid, pour order 0): 50,3960 50,50 5675,50 5675,3950

## Other copper
Top Layer:
  rectangle net +5: 1580,365 2285,1850

## Text inside footprints (layer, text, board x,y; h text height)
U1: Top 3D Body "TAB" at 585.34,3090.7 h25 r90